# EAGLE board RelayBoard (EAGLE 6.5.0), part 1 of 2
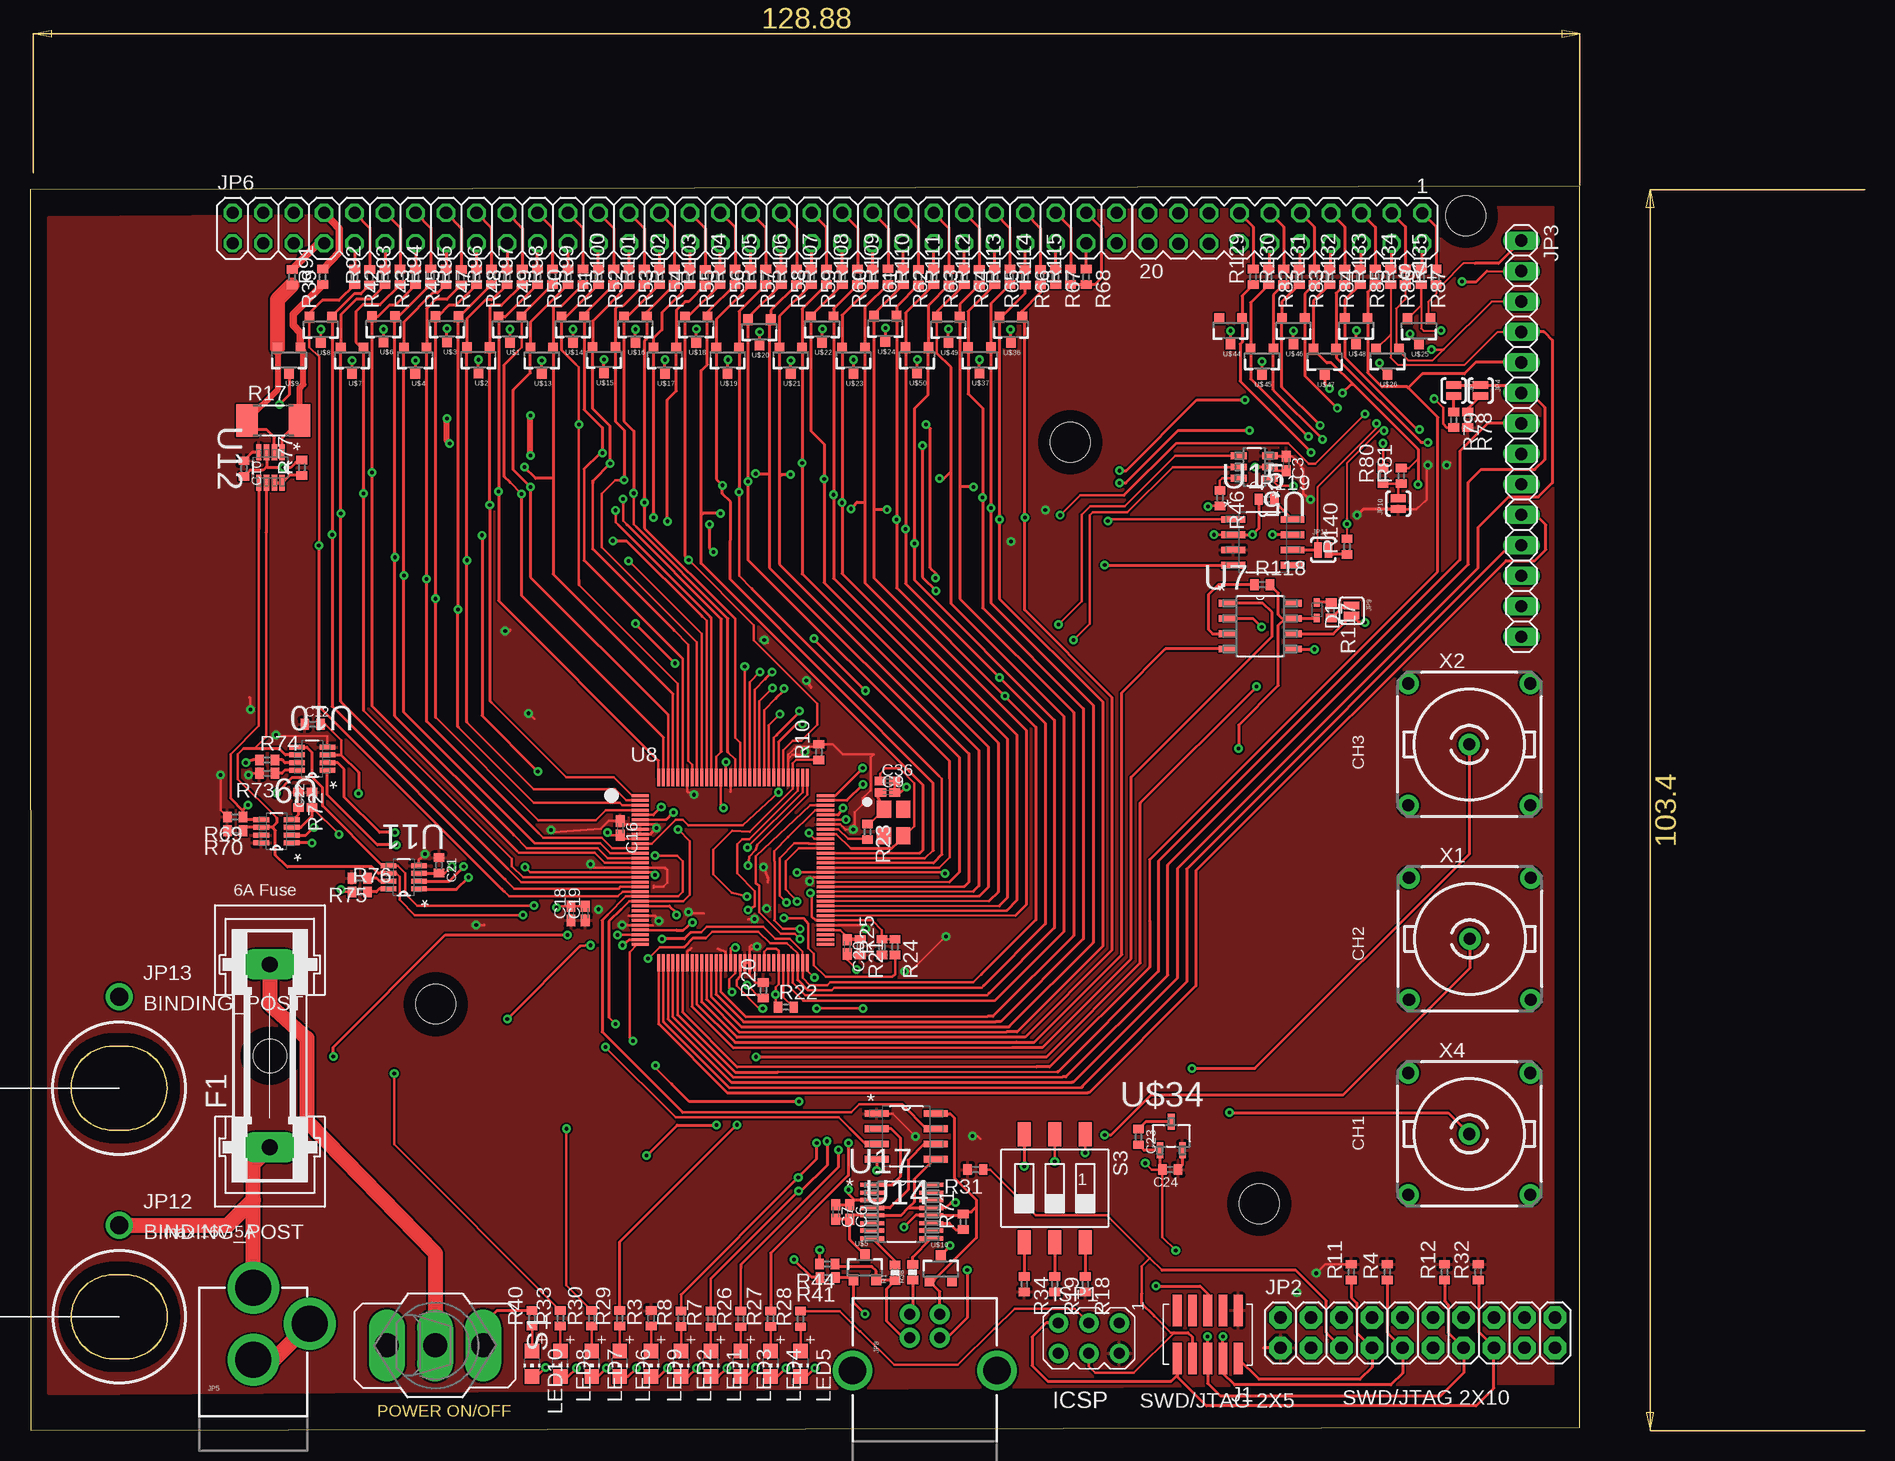
[diagram p0: board, top side]
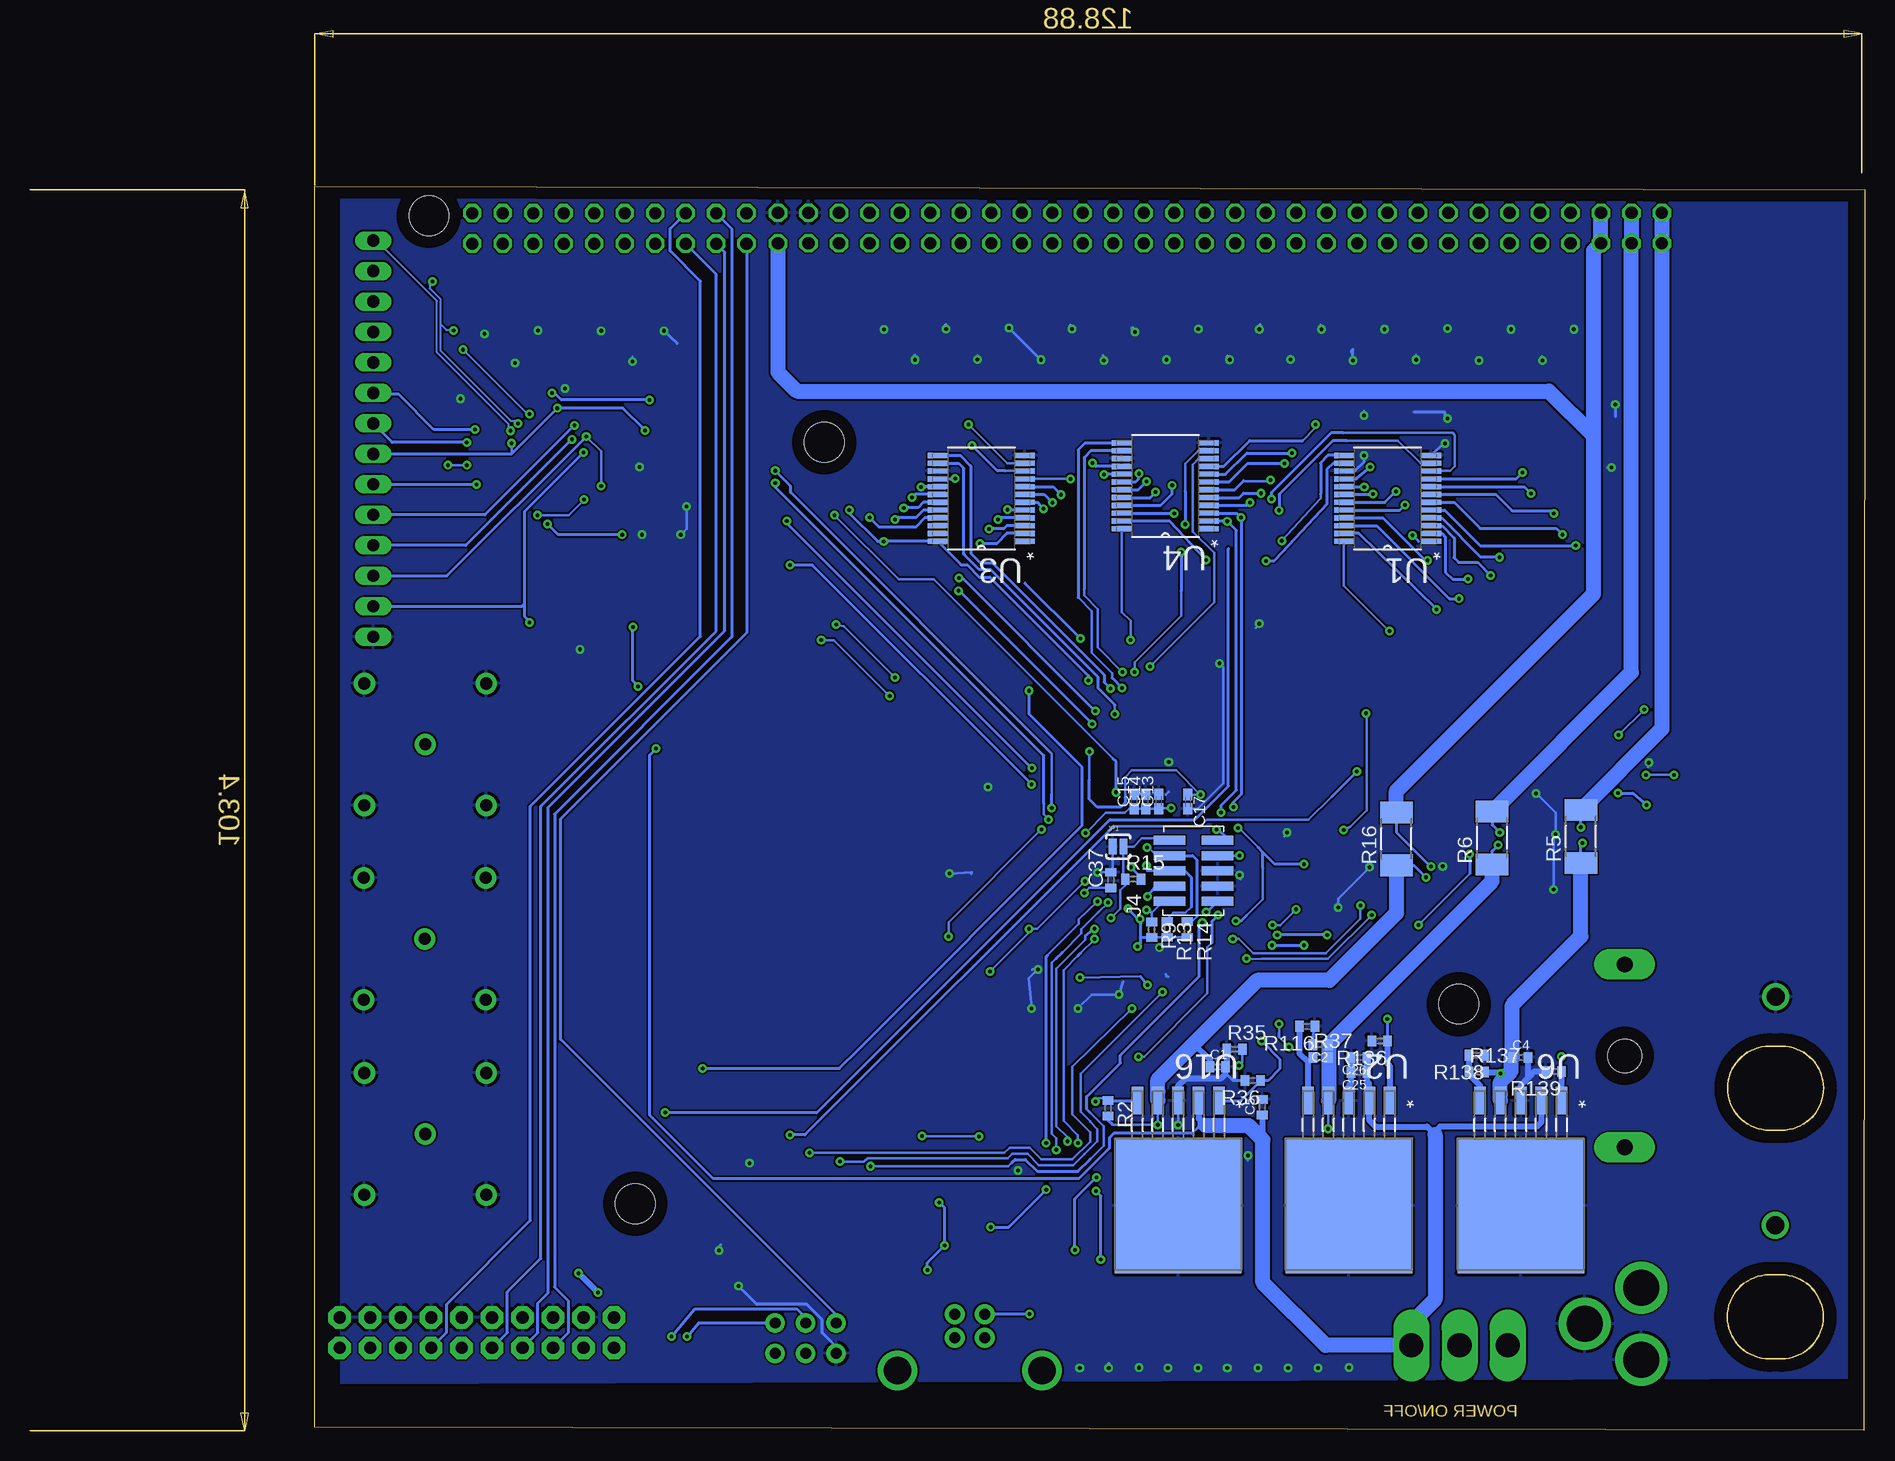
[diagram p1: board, bottom side, seen from below]

Size 129.13 x 103.68 mm. Coordinates in mm from the lower left corner, seen from the top.
Outline: 0.05,0 129.13,0.28 129.13,103.68 0,103.4 0.05,0
Copper layers (1*16): Top 0.035mm / dielectric 1.5mm / Bottom 0.035mm
Design rules "default *": minimum track width 6mil, minimum drill 12mil, track to track 6mil, track to pad 6mil, pad to pad 6mil, via to via 6mil, smd to smd 6mil, copper to edge 40mil, drill to drill 8mil, minimum pad ring 10mil, minimum via ring 8mil, stop-mask expansion 4mil, vias tented up to drill 0mil, thermal gap 10mil
Net classes: 1 PP: width 0.254 mm; 2 Ethernet: width 0.22 mm, clearance 0.152 mm; 3 digital: width 0.152 mm; 4 analog: width 0.152 mm

## Footprints (pad centres in the part's own frame; a part is rotated, then mirrored left to right if it is on the bottom)
C0402 = smd 0.7 x 0.9: 1 -0.65,0; 2 0.65,0
C0402K = smd 0.925 x 0.74: 1 -0.6,0; 2 0.6,0
SOD523 = smd 0.7 x 0.5: A 0.7,0; C -0.6,0
GSH15 = drill 1.321 pad 2.54 long: 1 -7.62,0; 2 7.62,0 | hole 2.794: 0,0
AVRISP = drill 0.9 pad 1.626: 1 -1.27,2.54; 2 1.27,2.54; 3 -1.27,0; 4 1.27,0; 5 -1.27,-2.54; 6 1.27,-2.54
CON_2X5_50MIL = smd 0.74 x 2.6: P1 0,0; P2 0,4.008; P3 1.27,0; P4 1.27,4.008; P5 2.54,0; P6 2.54,4.008; P7 3.81,0; P8 3.81,4.008; P9 5.08,0; P10 5.08,4.008
SJ_2S-NO = smd 0.635 x 1.27: 1 -0.45,0; 2 0.45,0
2X10 = drill 1.016 pad 1.88 octagon: 1 -11.43,-1.27; 2 -11.43,1.27; 3 -8.89,-1.27; 4 -8.89,1.27; 5 -6.35,-1.27; 6 -6.35,1.27; 7 -3.81,-1.27; 8 -3.81,1.27; 9 -1.27,-1.27; 10 -1.27,1.27; 11 1.27,-1.27; 12 1.27,1.27; 13 3.81,-1.27; 14 3.81,1.27; 15 6.35,-1.27; 16 6.35,1.27; 17 8.89,-1.27; 18 8.89,1.27; 19 11.43,-1.27; 20 11.43,1.27
1X14 = drill 1.016 long: 1 -16.51,0; 2 -13.97,0; 3 -11.43,0; 4 -8.89,0; 5 -6.35,0; 6 -3.81,0; 7 -1.27,0; 8 1.27,0; 9 3.81,0; 10 6.35,0; 11 8.89,0; 12 11.43,0; 13 13.97,0; 14 16.51,0
POWER_JACK_PTH = drill 2.997 pad 4.318: GND 0,7.7; GNDBREAK 4.7,10.7; PWR 0,13.7
2X30 = drill 1.016 octagon: 1 -38.1,-1.27; 2 -38.1,1.27; 3 -35.56,-1.27; 4 -35.56,1.27; 5 -33.02,-1.27; 6 -33.02,1.27; 7 -30.48,-1.27; 8 -30.48,1.27; 9 -27.94,-1.27; 10 -27.94,1.27; 11 -25.4,-1.27; 12 -25.4,1.27; 13 -22.86,-1.27; 14 -22.86,1.27; 15 -20.32,-1.27; 16 -20.32,1.27; 17 -17.78,-1.27; 18 -17.78,1.27; 19 -15.24,-1.27; 20 -15.24,1.27; 21 -12.7,-1.27; 22 -12.7,1.27; 23 -10.16,-1.27; 24 -10.16,1.27; 25 -7.62,-1.27; 26 -7.62,1.27; 27 -5.08,-1.27; 28 -5.08,1.27; 29 -2.54,-1.27; 30 -2.54,1.27; 31 0,-1.27; 32 0,1.27; 33 2.54,-1.27; 34 2.54,1.27; 35 5.08,-1.27; 36 5.08,1.27; 37 7.62,-1.27; 38 7.62,1.27; 39 10.16,-1.27; 40 10.16,1.27; 41 12.7,-1.27; 42 12.7,1.27; 43 15.24,-1.27; 44 15.24,1.27; 45 17.78,-1.27; 46 17.78,1.27; 47 20.32,-1.27; 48 20.32,1.27; 49 22.86,-1.27; 50 22.86,1.27; 51 25.4,-1.27; 52 25.4,1.27; 53 27.94,-1.27; 54 27.94,1.27; 55 30.48,-1.27; 56 30.48,1.27; 57 33.02,-1.27; 58 33.02,1.27; 59 35.56,-1.27; 60 35.56,1.27
USB-B-PTH = drill 0.914 pad 1.676: D+ 0,1.25; D- 1.981,1.25; GND 0,-1.25; VBUS 1.981,-1.25 | drill 2.286: S1 -2.718,-6.02; S2 -2.718,6.02
SJ_2S = smd 0.635 x 1.27: 1 -0.412,0; 2 0.412,0
BINDING_POST = drill 1.5: P$1 0,7.62
CHIP-LED0805 = smd 1.2 x 1.2: A 0,-1.05; C 0,1.05
0402-RES = smd 0.7 x 0.9: 1 -0.65,0; 2 0.65,0
R0402 = smd 0.7 x 0.9: 1 -0.65,0; 2 0.65,0
R5025 = smd 1.8 x 2.7: 1 -2.2,0; 2 2.2,0
320-916 = drill 2.007 long: 1 0,4.013; 2 0,0; 3 0,-4.013
SMS-003 = smd 1.092 x 2.007: 1 -2.54,-4.496; 2 0,-4.496; 3 2.54,-4.496; 4 2.54,4.496; 5 0,4.496; 6 -2.54,4.496
STAND-OFF = hole 3.302: 0,0
MA10-2 = drill 1.016 octagon: 1 -11.43,-1.27; 2 -11.43,1.27; 3 -8.89,-1.27; 4 -8.89,1.27; 5 -6.35,-1.27; 6 -6.35,1.27; 7 -3.81,-1.27; 8 -3.81,1.27; 9 -1.27,-1.27; 10 -1.27,1.27; 11 1.27,-1.27; 12 1.27,1.27; 13 3.81,-1.27; 14 3.81,1.27; 15 6.35,-1.27; 16 6.35,1.27; 17 8.89,-1.27; 18 8.89,1.27; 19 11.43,-1.27; 20 11.43,1.27
SOP65P780X200-24N = smd 1.651 x 0.432: 1 -3.632,3.581; 2 -3.632,2.921; 3 -3.632,2.286; 4 -3.632,1.626; 5 -3.632,0.965; 6 -3.632,0.33; 7 -3.632,-0.33; 8 -3.632,-0.965; 9 -3.632,-1.626; 10 -3.632,-2.286; 11 -3.632,-2.921; 12 -3.632,-3.581; 13 3.632,-3.581; 14 3.632,-2.921; 15 3.632,-2.286; 16 3.632,-1.626; 17 3.632,-0.965; 18 3.632,-0.33; 19 3.632,0.33; 20 3.632,0.965; 21 3.632,1.626; 22 3.632,2.286; 23 3.632,2.921; 24 3.632,3.581
TO170P1485X457-6N = smd 0.965 x 2.286: 1 -3.404,-8.611; 2 -1.702,-8.611; 3 0,-8.611; 4 1.702,-8.611; 5 3.404,-8.611 | smd 10.541 x 11.227: 6 0,0.152
SOT95P270X145-6N = smd 1.321 x 0.559: 1 -1.295,0.94; 2 -1.295,0; 3 -1.295,-0.94; 4 1.295,-0.94; 5 1.295,0; 6 1.295,0.94
SOIC127P600X175-8N = smd 1.473 x 0.559: 1 -2.718,1.905; 2 -2.718,0.635; 3 -2.718,-0.635; 4 -2.718,-1.905; 5 2.718,-1.905; 6 2.718,-0.635; 7 2.718,0.635; 8 2.718,1.905
TQFP-128 = smd 1.45 x 0.25: P$1 0,0; P$2 0,-0.4; P$3 0,-0.8; P$4 0,-1.2; P$5 0,-1.6; P$6 0,-2; P$7 0,-2.4; P$8 0,-2.8; P$9 0,-3.2; P$10 0,-3.6; P$11 0,-4; P$12 0,-4.4; P$13 0,-4.8; P$14 0,-5.2; P$15 0,-5.6; P$16 0,-6; P$17 0,-6.4; P$18 0,-6.8; P$19 0,-7.2; P$20 0,-7.6; P$21 0,-8; P$22 0,-8.4; P$23 0,-8.8; P$24 0,-9.2; P$25 0,-9.6; P$26 0,-10; P$27 0,-10.4; P$28 0,-10.8; P$29 0,-11.2; P$30 0,-11.6; P$31 0,-12; P$32 0,-12.4; P$65 15.45,-12.4; P$66 15.45,-12; P$67 15.45,-11.6; P$68 15.45,-11.2; P$69 15.45,-10.8; P$70 15.45,-10.4; P$71 15.45,-10; P$72 15.45,-9.6; P$73 15.45,-9.2; P$74 15.45,-8.8; P$75 15.45,-8.4; P$76 15.45,-8; P$77 15.45,-7.6; P$78 15.45,-7.2; P$79 15.45,-6.8; P$80 15.45,-6.4; P$81 15.45,-6; P$82 15.45,-5.6; P$83 15.45,-5.2; P$84 15.45,-4.8; P$85 15.45,-4.4; P$86 15.45,-4; P$87 15.45,-3.6; P$88 15.45,-3.2; P$89 15.45,-2.8; P$90 15.45,-2.4; P$91 15.45,-2; P$92 15.45,-1.6; P$93 15.45,-1.2; P$94 15.45,-0.8; P$95 15.45,-0.4; P$96 15.45,0 | smd 0.25 x 1.45: P$33 1.525,-13.925; P$34 1.925,-13.925; P$35 2.325,-13.925; P$36 2.725,-13.925; P$37 3.125,-13.925; P$38 3.525,-13.925; P$39 3.925,-13.925; P$40 4.325,-13.925; P$41 4.725,-13.925; P$42 5.125,-13.925; P$43 5.525,-13.925; P$44 5.925,-13.925; P$45 6.325,-13.925; P$46 6.725,-13.925; P$47 7.125,-13.925; P$48 7.525,-13.925; P$49 7.925,-13.925; P$50 8.325,-13.925; P$51 8.725,-13.925; P$52 9.125,-13.925; P$53 9.525,-13.925; P$54 9.925,-13.925; P$55 10.325,-13.925; P$56 10.725,-13.925; P$57 11.125,-13.925; P$58 11.525,-13.925; P$59 11.925,-13.925; P$60 12.325,-13.925; P$61 12.725,-13.925; P$62 13.125,-13.925; P$63 13.525,-13.925; P$64 13.925,-13.925; P$97 13.925,1.525; P$98 13.525,1.525; P$99 13.125,1.525; P$100 12.725,1.525; P$101 12.325,1.525; P$102 11.925,1.525; P$103 11.525,1.525; P$104 11.125,1.525; P$105 10.725,1.525; P$106 10.325,1.525; P$107 9.925,1.525; P$108 9.525,1.525; P$109 9.125,1.525; P$110 8.725,1.525; P$111 8.325,1.525; P$112 7.925,1.525; P$113 7.525,1.525; P$114 7.125,1.525; P$115 6.725,1.525; P$116 6.325,1.525; P$117 5.925,1.525; P$118 5.525,1.525; P$119 5.125,1.525; P$120 4.725,1.525; P$121 4.325,1.525; P$122 3.925,1.525; P$123 3.525,1.525; P$124 3.125,1.525; P$125 2.725,1.525; P$126 2.325,1.525; P$127 1.925,1.525; P$128 1.525,1.525
SOT65P280X145-8N = smd 1.321 x 0.432: 1 -1.27,0.965; 2 -1.27,0.33; 3 -1.27,-0.33; 4 -1.27,-0.965; 5 1.27,-0.965; 6 1.27,-0.33; 7 1.27,0.33; 8 1.27,0.965
SOIC127P600X175-8N' = smd 1.981 x 0.559: 1 -2.464,1.905; 2 -2.464,0.635; 3 -2.464,-0.635; 4 -2.464,-1.905; 5 2.464,-1.905; 6 2.464,-0.635; 7 2.464,0.635; 8 2.464,1.905
SOP63P600X175-16N = smd 1.981 x 0.356: 1 -2.464,2.235; 2 -2.464,1.575; 3 -2.464,0.965; 4 -2.464,0.305; 5 -2.464,-0.305; 6 -2.464,-0.965; 7 -2.464,-1.575; 8 -2.464,-2.235; 9 2.464,-2.235; 10 2.464,-1.575; 11 2.464,-0.965; 12 2.464,-0.305; 13 2.464,0.305; 14 2.464,0.965; 15 2.464,1.575; 16 2.464,2.235
SOT23-3 = smd 0.8 x 0.9: 1 -0.95,-1; 2 0.95,-1; 3 0,1.1
SOT95P300X145-3N = smd 0.559 x 1.321: 1 -0.94,-1.194; 2 0.94,-1.194; 3 0,1.194
A1944 = drill 1.016 pad 1.778: 1 0,0; 2 5.08,5.08; 3 -5.08,5.08; 4 -5.08,-5.08; 5 5.08,-5.08
NDK3.2X2.5 = smd 1.4 x 1.2: P$1 0,0; P$2 2.2,0; P$3 2.2,1.6; P$4 0,1.6

## Placement (x,y rotation side)
C1  10uF  [C0402]  53.9,30.3 0 bottom
C2  10uF  [C0402]  45.31,32.16 180 bottom
C3  0.1uF  [C0402K]  104.7,80.59 270 top
C4  10uF  [C0402]  28.7,31.09 0 bottom
C5  10uF  [C0402]  50.19,26.95 90 bottom
C6  0.1uF  [C0402K]  68.33,18.21 270 top
C7  10uF  [C0402K]  67.16,18.21 270 top
C9  12pF  [C0402K]  71.48,53.16 0 top
C10  0.1uF  [C0402]  17.83,80.16 270 top
C12  0.1uF  [C0402]  23.55,58.85 0 top
C13  0.1uF  [C0402K]  58.83,52.43 90 bottom
C14  0.1uF  [C0402K]  59.92,52.43 90 bottom
C15  2.2uF  [C0402K]  60.86,52.43 90 bottom
C16  0.1uF  [C0402K]  49.2,50.19 270 top
C17  0.1uF  [C0402K]  56.39,52.4 270 bottom
C18  0.1uF  [C0402K]  45.09,43.1 90 top
C19  0.1uF  [C0402K]  46.28,43.1 90 top
C20  0.1uF  [C0402K]  68.1,40.31 270 top
C21  0.1uF  [C0402]  34.09,47.09 270 top
C22  0.1uF  [C0402]  23.5,52.55 90 top
C23  1uF  [C0402]  92.38,24.46 270 top
C24  1uF  [C0402]  95.02,21.74 180 top
C25  10uF  [C0402]  42.14,29.84 180 bottom
C26  10uF  [C0402]  42.14,31.09 180 bottom
C36  12pF  [C0402K]  71.45,54.13 0 top
C37  0.1uF  [C0402]  62.81,45.87 90 bottom
D1  [SOD523]  107.24,68.4 270 top
F1  [GSH15]  19.99,31.22 90 top
ISP1  AVRISP-6  [AVRISP]  88.24,7.7 270 top
J1  JTAG_ARM_10PIN  [CON_2X5_50MIL]  100.69,10.01 180 top
J4  JTAG_ARM_10PIN  [CON_2X5_50MIL]  53.92,44.09 90 bottom
JP1  RESET  [SJ_2S-NO]  62.2,48.67 0 bottom
JP2  [2X10]  115.65,8.15 0 top
JP3  [1X14]  124.28,82.65 270 top
JP4  DUT_CS_MASTER  [SJ_2S-NO]  120.88,86.66 270 top
JP5  POWER_JACKPTH  [POWER_JACK_PTH]  18.62,-1.8 0 top
JP6  [2X30]  54.99,100.2 0 top
JP7  DUT_CS_RecieveAllMSG  [SJ_2S-NO]  118.64,86.66 270 top
JP8  USB-B  [USB-B-PTH]  74.57,7.72 90 top
JP9  [SJ_2S]  110.13,68.33 270 top
JP10  DUT_CS_MASTER  [SJ_2S-NO]  114.02,77.24 90 top
JP11  [SJ_2S-NO]  107.77,73.38 0 top
JP12  BINDING_POST  [BINDING_POST]  7.44,9.47 0 top
JP13  BINDING_POST  [BINDING_POST]  7.42,28.52 0 top
LED1  [CHIP-LED0805]  56.74,5.56 180 top
LED2  [CHIP-LED0805]  54.25,5.56 180 top
LED3  [CHIP-LED0805]  59.23,5.56 180 top
LED4  [CHIP-LED0805]  61.72,5.56 180 top
LED5  [CHIP-LED0805]  64.21,5.56 180 top
LED6  [CHIP-LED0805]  49.15,5.56 180 top
LED7  [CHIP-LED0805]  46.81,5.56 180 top
LED8  [CHIP-LED0805]  44.2,5.56 180 top
LED9  [CHIP-LED0805]  51.77,5.56 180 top
LED10  [CHIP-LED0805]  41.83,5.56 180 top
R1  22R  [0402-RES]  72.09,13.16 90 top
R2  [R0402]  63.04,26.85 270 bottom
R3  [R0402]  51.77,9.35 90 top
R4  4k7  [R0402]  113.11,13.21 90 top
R5  [R5025]  23.65,49.5 90 bottom
R6  [R5025]  31.04,49.38 90 bottom
R7  [R0402]  56.74,9.3 90 top
R8  [R0402]  54.25,9.32 90 top
R9  4.7k  [R0402]  59.41,41.73 270 bottom
R10  4.7k  [R0402]  65.74,56.54 90 top
R11  4k7  [R0402]  110.11,13.21 90 top
R12  4k7  [R0402]  117.88,13.21 90 top
R13  4.7k  [R0402]  58.12,41.76 270 bottom
R14  4.7k  [R0402]  56.44,41.76 270 bottom
R15  4.7k  [R0402]  60.96,45.95 0 bottom
R16  [R5025]  39.01,49.3 90 bottom
R17  [R5025]  20.27,84.18 0 top
R18  4.7k  [R0402]  87.94,12.19 270 top
R19  4.7k  [R0402]  85.39,12.19 270 top
R20  1M  [R0402]  61.11,36.68 90 top
R21  51  [R0402]  69.19,40.28 270 top
R22  4.87k 1%  [R0402]  62.99,35.28 0 top
R23  2k  [R0402]  69.8,49.89 270 top
R24  100  [R0402]  72.09,40.28 270 top
R25  10k  [R0402]  70.99,40.28 90 top
R26  [R0402]  59.23,9.3 90 top
R27  [R0402]  61.72,9.32 90 top
R28  [R0402]  64.21,9.3 90 top
R29  [R0402]  49.15,9.35 90 top
R30  [R0402]  46.81,9.35 90 top
R31  4k7  [R0402]  78.79,21.74 180 top
R32  4k7  [R0402]  120.68,13.21 90 top
R33  [R0402]  44.2,9.35 90 top
R34  4.7k  [R0402]  82.86,12.19 270 top
R35  [R0402]  52.5,31.77 0 bottom
R36  4k7  [R0402]  50.98,29.16 180 bottom
R37  [R0402]  45.31,31.09 0 bottom
R38  22R  [0402-RES]  73.56,13.18 90 top
R39  200R  [R0402]  21.84,96.11 270 top
R40  [R0402]  41.83,9.35 90 top
R41  0R  [R0402]  66.47,12.75 180 top
R42  200R  [R0402]  27.05,96.14 270 top
R43  200R  [R0402]  29.59,96.14 270 top
R44  0R  [R0402]  66.45,13.87 180 top
R45  200R  [R0402]  32.13,96.14 270 top
R46  4.7k  [R0402]  99.16,77.7 270 top
R47  200R  [R0402]  34.67,96.14 270 top
R48  200R  [R0402]  37.21,96.14 270 top
R49  200R  [R0402]  39.75,96.14 270 top
R50  200R  [R0402]  42.29,96.14 270 top
R51  200R  [R0402]  44.83,96.14 270 top
R52  200R  [R0402]  47.37,96.14 270 top
R53  200R  [R0402]  49.91,96.14 270 top
R54  200R  [R0402]  52.45,96.14 270 top
R55  200R  [R0402]  54.99,96.14 270 top
R56  200R  [R0402]  57.51,96.14 270 top
R57  200R  [R0402]  60.07,96.14 270 top
R58  200R  [R0402]  62.61,96.14 270 top
R59  200R  [R0402]  65.1,96.14 270 top
R60  200R  [R0402]  67.69,96.14 270 top
R61  200R  [R0402]  70.23,96.14 270 top
R62  200R  [R0402]  72.77,96.14 270 top
R63  200R  [R0402]  75.31,96.14 270 top
R64  200R  [R0402]  77.85,96.14 270 top
R65  200R  [R0402]  80.39,96.14 270 top
R66  200R  [R0402]  82.93,96.11 270 top
R67  200R  [R0402]  85.47,96.14 270 top
R68  200R  [R0402]  88.01,96.14 270 top
R69  4.7k  [R0402]  17.09,51.13 180 top
R70  4.7k  [R0402]  17.09,49.99 180 top
R71  4.7k  [R0402]  77.78,17.4 90 top
R72  4k7  [R0402]  22.38,52.55 270 top
R73  4k7  [R0402]  19.76,54.76 180 top
R74  4k7  [R0402]  19.76,55.88 0 top
R75  4k7  [R0402]  27.48,46.02 180 top
R76  4k7  [R0402]  27.48,44.88 0 top
R77  4k7  [R0402]  22.66,80.24 90 top
R78  4.7k  [R0402]  119.81,84.23 270 top
R79  4.7k  [R0402]  118.64,84.23 270 top
R80  4.7k  [R0402]  112.75,79.55 90 top
R81  4.7k  [R0402]  114.27,79.55 90 top
R82  200R  [R0402]  103.23,96.14 270 top
R83  200R  [R0402]  105.77,96.14 270 top
R84  200R  [R0402]  108.31,96.14 270 top
R85  200R  [R0402]  110.85,96.14 270 top
R86  200R  [R0402]  113.39,96.14 270 top
R87  200R  [R0402]  115.93,96.14 270 top
R91  200R  [R0402]  24.38,96.14 90 top
R92  200R  [R0402]  28.32,96.11 90 top
R93  200R  [R0402]  30.84,96.14 90 top
R94  200R  [R0402]  33.4,96.16 90 top
R95  200R  [R0402]  35.94,96.11 90 top
R96  200R  [R0402]  38.46,96.14 90 top
R97  200R  [R0402]  41.02,96.14 90 top
R98  200R  [R0402]  43.54,96.14 90 top
R99  200R  [R0402]  46.08,96.14 90 top
R100  200R  [R0402]  48.64,96.14 90 top
R101  200R  [R0402]  51.18,96.14 90 top
R102  200R  [R0402]  53.7,96.14 90 top
R103  200R  [R0402]  56.26,96.11 90 top
R104  200R  [R0402]  58.75,96.14 90 top
R105  200R  [R0402]  61.32,96.14 90 top
R106  200R  [R0402]  63.88,96.14 90 top
R107  200R  [R0402]  66.37,96.14 90 top
R108  200R  [R0402]  68.96,96.14 90 top
R109  200R  [R0402]  71.5,96.16 90 top
R110  200R  [R0402]  74.04,96.11 90 top
R111  200R  [R0402]  76.58,96.11 90 top
R112  200R  [R0402]  79.1,96.11 90 top
R113  200R  [R0402]  81.66,96.14 90 top
R114  200R  [R0402]  84.2,96.11 90 top
R115  200R  [R0402]  86.72,96.14 90 top
R116  [R0402]  46.46,33.68 180 bottom
R117  1k  [R0402]  108.43,68.35 270 top
R118  4k7  [R0402]  102.69,70.48 0 top
R119  4k7  [R0402]  103.05,77.6 0 top
R129  200R  [R0402]  101.93,96.14 90 top
R130  200R  [R0402]  104.47,96.14 90 top
R131  200R  [R0402]  107.01,96.14 90 top
R132  200R  [R0402]  109.55,96.14 90 top
R133  200R  [R0402]  112.12,96.16 90 top
R134  200R  [R0402]  114.61,96.14 90 top
R135  200R  [R0402]  117.17,96.14 90 top
R136  4k7  [R0402]  40.41,32.46 180 bottom
R137  [R0402]  32.31,29.87 0 bottom
R138  [R0402]  32.31,31.27 180 bottom
R139  4k7  [R0402]  25.91,29.92 180 bottom
R140  120  [R0402]  109.75,73.66 90 top
S1  [320-916]  33.76,7.09 270 top
S3  SWS003  [SMS-003]  85.39,20.19 180 top
STANDOFF1  STAND-OFF  [STAND-OFF]  33.81,35.53 0 top
STANDOFF2  STAND-OFF  [STAND-OFF]  119.63,101.22 0 top
STANDOFF5  STAND-OFF  [STAND-OFF]  86.69,82.35 0 top
STANDOFF6  STAND-OFF  [STAND-OFF]  102.44,18.9 0 top
SV1  [MA10-2]  104.6,100.18 180 top
U1  CD74HC4067SM96  [SOP65P780X200-24N]  39.75,77.67 180 bottom
U2  TL1963AKTTR.  [TO170P1485X457-6N]  42.98,18.87 180 bottom
U3  CD74HC4067SM96  [SOP65P780X200-24N]  73.61,77.67 180 bottom
U4  CD74HC4067SM96  [SOP65P780X200-24N]  58.27,78.71 180 bottom
U5  MCP4725A0T-E/CH  [SOT95P270X145-6N]  102.03,80.29 180 top
U6  TL1963AKTTR.  [TO170P1485X457-6N]  28.65,18.87 180 bottom
U7  MCP2003-E/SN  [SOIC127P600X175-8N]  102.51,67.03 0 top
U8  TM4C1294NCPDT  [TQFP-128]  50.85,52.91 0 top
U9  INA219AIDCNR  [SOT65P280X145-8N]  20.55,49.94 180 top
U10  INA219AIDCNR  [SOT65P280X145-8N]  23.52,55.98 180 top
U11  INA219AIDCNR  [SOT65P280X145-8N]  31.14,46.1 180 top
U12  INA219AIDCNR  [SOT65P280X145-8N]  20.04,80.24 270 top
U14  ADUM1201ARZ  [SOIC127P600X175-8N']  73.03,24.51 0 top
U15  SN65HVD230D  [SOIC127P600X175-8N']  102.74,74.02 0 top
U16  TL1963AKTTR.  [TO170P1485X457-6N]  57.2,18.87 180 bottom
U17  FT230XS  [SOP63P600X175-16N]  72.64,18.24 0 top
U$1  zener_3.3V  [SOT23-3]  40.01,91.8 180 top
U$2  zener_3.3V  [SOT23-3]  37.36,89.23 180 top
U$3  zener_3.3V  [SOT23-3]  34.75,91.82 180 top
U$4  zener_3.3V  [SOT23-3]  32.11,89.2 180 top
U$5  zener_3.3V  [SOT23-3]  69.57,13.56 0 top
U$6  zener_3.3V  [SOT23-3]  29.46,91.82 180 top
U$7  zener_3.3V  [SOT23-3]  26.85,89.2 180 top
U$8  zener_3.3V  [SOT23-3]  24.23,91.77 180 top
U$9  zener_3.3V  [SOT23-3]  21.59,89.2 180 top
U$10  zener_3.3V  [SOT23-3]  75.9,13.46 0 top
U$13  zener_3.3V  [SOT23-3]  42.65,89.2 180 top
U$14  zener_3.3V  [SOT23-3]  45.24,91.8 180 top
U$15  zener_3.3V  [SOT23-3]  47.83,89.26 180 top
U$16  zener_3.3V  [SOT23-3]  50.44,91.8 180 top
U$17  zener_3.3V  [SOT23-3]  52.91,89.2 180 top
U$18  zener_3.3V  [SOT23-3]  55.52,91.8 180 top
U$19  zener_3.3V  [SOT23-3]  58.14,89.2 180 top
U$20  zener_3.3V  [SOT23-3]  60.78,91.57 180 top
U$21  zener_3.3V  [SOT23-3]  63.4,89.2 180 top
U$22  zener_3.3V  [SOT23-3]  66.01,91.8 180 top
U$23  zener_3.3V  [SOT23-3]  68.63,89.2 180 top
U$24  zener_3.3V  [SOT23-3]  71.27,91.85 180 top
U$25  zener_3.3V  [SOT23-3]  115.75,91.64 180 top
U$26  zener_3.3V  [SOT23-3]  113.13,89.13 180 top
U$34  MCP1703T-3302E/CB  [SOT95P300X145-3N]  95.1,24.54 0 top
U$36  zener_3.3V  [SOT23-3]  81.74,91.77 180 top
U$37  zener_3.3V  [SOT23-3]  79.12,89.23 180 top
U$44  zener_3.3V  [SOT23-3]  100.05,91.67 180 top
U$45  zener_3.3V  [SOT23-3]  102.67,89.13 180 top
U$46  zener_3.3V  [SOT23-3]  105.28,91.67 180 top
U$47  zener_3.3V  [SOT23-3]  107.9,89.1 180 top
U$48  zener_3.3V  [SOT23-3]  110.52,91.67 180 top
U$49  zener_3.3V  [SOT23-3]  76.53,91.77 180 top
U$50  zener_3.3V  [SOT23-3]  73.91,89.23 180 top
X1  A1944-50  [A1944]  119.99,40.97 0 top
X2  A1944-50  [A1944]  119.94,57.18 0 top
X4  A1944-50  [A1944]  119.94,24.71 0 top
Y3  NX3225GA  [NDK3.2X2.5]  71.17,51.76 270 top

## Library data of the parts
C1-C7 C9 C10 C12-C26 C36 R20-R25 = rcl
C37 = eagle-ltspice; SPICEMODEL: NONE; SPICEPREFIX: C
D1 = diode
F1 = fuse; MPN: 64900001039; OC_FARNELL: 1271673; OC_NEWARK: 02P0318
ISP1 JP3 LED1-LED10 R5 R6 R16 R17 = JDT-1800_smahed
J1 J4 = MRDT-Connectors; PARTNO: M50-3600542
JP1 JP4 JP7 JP9 JP10 = SparkFun-Retired
JP2 JP12 JP13 = SparkFun-Connectors
JP5 = SparkFun-Connectors; PROD_ID: CONN-08197
JP6 = pinhead
JP8 = SparkFun-Connectors; PROD_ID: CONN-08278
JP11 = SparkFun
R1 R38 = SparkFun-Passives
R2-R4 R7-R15 R18 R19 R26-R37 R39-R87 R91-R119 R129-R140 = resistor
S1 = switch
S3 = smd-special
STANDOFF1 STANDOFF2 STANDOFF5 STANDOFF6 = SparkFun-Electromechanical
SV1 = con-lstb; OC_FARNELL: unknown; OC_NEWARK: unknown
U1 U3 U4 = MUX; MPN: CD74HC4067SM96; OC_FARNELL: 1601157; OC_NEWARK: 13N4201; PACKAGE: SOP-24; SUPPLIER: TEXAS INSTRUMENTS
U2 U6 U16 = TL1963; MPN: TL1963AKTTR.; OC_FARNELL: 2112627; OC_NEWARK: 33R2190; PACKAGE: 5TO263; SUPPLIER: TEXAS INSTRUMENTS
U5 = MCP4725; MPN: MCP4725A0T-E/CH; OC_FARNELL: 1578449; OC_NEWARK: 77M3032; PACKAGE: SOT-23-6; SUPPLIER: Microchip
U7 = MCP2003-E_SN; MPN: MCP2003-E/SN; OC_FARNELL: 1826237; OC_NEWARK: 65R5493; PACKAGE: SOIC-8; SUPPLIER: Microchip
U8 = MRDT-Microcontrollers
U9-U12 = INA219; MPN: INA219AIDCNR; OC_FARNELL: 2295989; OC_NEWARK: 09P2546; PACKAGE: SOT-23-8; SUPPLIER: Texas Instruments
U14 = ADUM1201ARZ; MPN: ADUM1201ARZ; OC_FARNELL: 1078200; OC_NEWARK: 19M0753; PACKAGE: SOIC-8; SUPPLIER: Analog Devices
U15 = sn65hvd23x; MPN: SN65HVD230D; OC_FARNELL: 1103105; OC_NEWARK: 75C7744; PACKAGE: SOIC-8; SUPPLIER: Texas Instruments
U17 = FT230XS; MPN: FT230XS; OC_FARNELL: 2081321; OC_NEWARK: 83T7087; PACKAGE: SSOP-16; SUPPLIER: FTDI
U$1-U$10 U$13-U$26 U$36 U$37 U$44-U$50 = SparkFun-DiscreteSemi
U$34 = MCP1703; MPN: MCP1703T-3302E/CB; OC_FARNELL: 1439518; OC_NEWARK: 40M0637; PACKAGE: SOT-3; SUPPLIER: Microchip
X1 X2 X4 = con-coax; OC_FARNELL: unknown; OC_NEWARK: unknown
Y3 = MRDT-Passives

## Nets
!RESET: J4.P10 JP1.2 R15.1 R24.2
AD0: R42.2 U1.5 U8.P$21 U$8.2
AD1: R92.1 U1.6 U8.P$20 U$8.1
AD2: R43.2 U1.7 U8.P$19 U$7.2
AD3: R93.1 U1.8 U8.P$18 U$7.1
AD4: R45.2 U1.9 U8.P$15 U$6.2
AD5: R94.1 U1.4 U8.P$14 U$6.1
AD6: R47.2 U1.3 U8.P$13 U$4.2
AD7: R95.1 U1.2 U8.P$12 U$4.1
AD8: R48.2 U1.22 U8.P$4 U$3.2
AD9: R96.1 U1.23 U8.P$3 U$3.1
AD10: R49.2 U1.21 U8.P$2 U$2.2
AD11: R97.1 U1.20 U8.P$1 U$2.1
AD12: R50.2 U1.19 U8.P$128 U$1.2
AD13: R98.1 U1.18 U8.P$127 U$1.1
AD14: R51.2 U1.17 U8.P$126 U$13.2
AD15: R99.1 U1.16 U8.P$125 U$13.1
AD16: R52.2 U4.9 U8.P$124 U$14.2
AD17: R100.1 U4.8 U8.P$123 U$14.1
AD18: R53.2 U4.7 U8.P$121 U$15.2
AD19: R101.1 U4.6 U8.P$120 U$15.1
ADJ3: R2.1 R35.2 U16.5
ADJ4: R37.1 R116.2 U2.5
ADJ5: R137.1 R138.2 U6.5
CAN_RX: U8.P$95 U15.4
CAN_TX: U8.P$96 U15.1
CH1: U4.1
CH2: U1.1
CH3: U3.1
D0: R54.2 U4.5 U8.P$112 U$16.2
D1: R102.1 U4.4 U8.P$111 U$16.1
D2: R55.2 U4.3 U8.P$5 U$17.2
D3: R103.1 U4.2 U8.P$6 U$17.1
D4: R56.2 U4.23 U8.P$102 U$18.2
D5: R104.1 U4.22 U8.P$84 U$18.1
D6: R57.2 U4.21 U8.P$83 U$19.2
D7: R105.1 U4.20 U8.P$82 U$19.1
D8: R58.2 U4.19 U8.P$81 U$20.2
D9: R106.1 U4.18 U8.P$78 U$20.1
D10: R59.2 U4.17 U8.P$77 U$21.2
D11: R107.1 U4.16 U8.P$76 U$21.1
D12 [Power]: R60.2 U3.9 U8.P$75 U$22.2
D13 [Power]: R108.1 U3.8 U8.P$74 U$22.1
D14 [Power]: R61.2 U3.7 U8.P$73 U$23.2
D15 [Power]: R109.1 U3.6 U8.P$72 U$23.1
D16 [Power]: R62.2 U3.5 U8.P$71 U$24.2
D19: R111.1 U3.2 U8.P$61 U$50.1
D20: R64.2 U3.16 U8.P$60 U$49.2
D21: R112.1 U3.17 U8.P$46 U$49.1
D22: R65.2 U3.18 U8.P$45 U$37.2
D23: R113.1 U3.19 U8.P$44 U$37.1
D24: R66.2 U3.20 U8.P$43 U$36.2
D25: R114.1 U3.21 U8.P$42 U$36.1
D26: U3.22
D27: U3.23
DUT_AOUT1: JP3.12 R82.2 U5.1 U$45.2
DUT_CAN_N: JP3.2 JP11.1 R87.2 U15.6 U$25.2
DUT_CAN_P: JP3.1 R135.1 R140.2 U15.7 U$25.1
DUT_CONNECT: R27.2 U8.P$85
DUT_CS: JP3.6 JP4.1 JP7.1 R85.2 U8.P$36 U$48.2
DUT_LIN: JP3.13 JP9.2 R129.1 U7.6 U$44.1
DUT_MISO: JP3.4 R86.2 U8.P$35 U$26.2
DUT_MOSI: JP3.7 R132.1 U8.P$37 U$47.1
DUT_ONEWIRE: JP3.3 R134.1 U8.P$11 U$26.1
DUT_RX: JP3.10 R83.2 U8.P$33 U$46.2
DUT_SCL: JP3.8 R80.2 R131.1 U8.P$91 U$46.1
DUT_SCLK: JP3.5 R133.1 U8.P$38 U$48.1
DUT_SDA: JP3.9 R81.2 R84.2 U8.P$92 U$47.2
DUT_SH+ [Power]: R17.2 R91.1 U12.1 U$9.1
DUT_SH- [Power]: R17.1 R39.2 U12.2 U$9.2
DUT_TX: JP3.11 R130.1 U8.P$34 U$45.1
GND: C1.2 C2.2 C3.2 C4.2 C5.2 C9.2 C10.2 C12.2 C13.2 C14.2 C15.2 C16.2 C17.2 C18.2 C19.2 C20.2 C21.2 C22.1 C23.2 C24.2 C25.2 C26.2 C36.2 C37.2 ISP1.6 J1.P5 J4.P3 J4.P5 JP1.1 JP2.4 JP2.6 JP2.8 JP2.10 JP2.12 JP2.14 JP2.16 JP2.18 JP2.20 JP3.14 JP5.GND JP5.GNDBREAK JP6.58 JP6.60 JP13.P$1 LED1.C LED2.C LED3.C LED4.C LED5.C LED6.C LED7.C LED8.C LED9.C LED10.C R22.1 R35.1 R36.2 R46.2 R68.2 R74.1 R76.1 R77.2 R79.2 R115.1 R116.1 R119.1 R136.2 R138.1 R139.2 U1.12 U1.15 U2.3 U2.6 U3.12 U3.15 U4.12 U4.15 U5.2 U6.3 U6.6 U7.5 U8.P$10 U8.P$17 U8.P$48 U8.P$55 U8.P$58 U8.P$80 U8.P$114 U9.3 U10.3 U11.3 U12.3 U14.4 U15.2 U16.3 U16.6 U$1.3 U$2.3 U$3.3 U$4.3 U$6.3 U$7.3 U$8.3 U$9.3 U$13.3 U$14.3 U$15.3 U$16.3 U$17.3 U$18.3 U$19.3 U$20.3 U$21.3 U$22.3 U$23.3 U$24.3 U$25.3 U$26.3 U$34.1 U$36.3 U$37.3 U$44.3 U$45.3 U$46.3 U$47.3 U$48.3 U$49.3 U$50.3 X1.2 X1.3 X1.4 X1.5 X2.2 X2.3 X2.4 X2.5 X4.2 X4.3 X4.4 X4.5
HOST_GND: C6.2 C7.2 JP8.GND U14.5 U17.5 U17.13 U$5.3 U$10.3
HOST_UART_RX: U14.6 U17.4
HOST_UART_TX: U14.2 U17.1
LDO1 [Power]: JP6.5 JP6.6 JP6.59 R16.2 U11.2
LDO1_ENABLE: R36.1 U8.P$32 U16.1
LDO1_SH+ [Power]: C1.1 R2.2 R16.1 R29.2 U11.1 U16.4
LDO2 [Power]: JP6.3 JP6.4 R6.2 U10.2
LDO2_ENABLE: R136.1 U2.1 U8.P$31
LDO2_SH+ [Power]: C2.1 R6.1 R30.2 R37.2 U2.4 U10.1
LDO3 [Power]: JP6.1 JP6.2 R5.2 U9.2
LDO3_ENABLE: R139.1 U6.1 U8.P$30
LDO3_SH+ [Power]: C4.1 R5.1 R33.2 R137.2 U6.4 U9.1
LIN_CS: U7.2 U8.P$24
LIN_RX: U7.1 U8.P$40
LIN_TX: U7.4 U8.P$41
M0OUT: X4.1
M0S0: U4.13 U8.P$107
M0S1: U4.14 U8.P$108
M0S2: U4.11 U8.P$109
M0S3: U4.10 U8.P$110
M1OUT: X1.1
M1S0: U1.10 U8.P$116
M1S1: U1.11 U8.P$117
M1S2: U1.14 U8.P$119
M1S3: U1.13 U8.P$118
M2OUT: X2.1
M2S0: U3.10 U8.P$103
M2S1: U3.11 U8.P$104
M2S2: U3.14 U8.P$105
M2S3: U3.13 U8.P$106
N$1: R46.1 U5.6
N$2: JP11.2 R140.1
N$3: LED2.A R8.1
N$4: R87.1 SV1.2
N$5: LED1.A R7.1
N$6: R135.2 SV1.1
N$7: F1.2 S1.2
N$8: JP6.7 R39.1
N$9: JP6.9 R42.1
N$10: JP6.11 R43.1
N$11: JP6.13 R45.1
N$12: JP6.15 R47.1
N$13: JP6.17 R48.1
N$14: JP6.19 R49.1
N$15: JP6.21 R50.1
N$16: JP6.23 R51.1
N$17: JP6.25 R52.1
N$18: JP6.27 R53.1
N$19: JP6.29 R54.1
N$20: JP6.31 R55.1
N$21: JP6.33 R56.1
N$22: JP6.35 R57.1
N$23: LED3.A R26.1
N$24: JP6.37 R58.1
N$25: LED4.A R27.1
N$26: JP6.39 R59.1
N$27: JP6.41 R60.1
N$28: JP6.43 R61.1
N$29: JP6.45 R62.1
N$30: JP6.47 R63.1
N$31: JP6.49 R64.1
N$32: JP6.51 R65.1
N$33: LED5.A R28.1
N$34: LED6.A R29.1
N$35: LED7.A R30.1
N$36: LED8.A R33.1
N$37: JP6.53 R66.1
N$38: JP6.55 R67.1
N$39: JP6.57 R68.1
N$40: F1.1 JP5.PWR JP12.P$1
N$41: R18.1 S3.6
N$42: R19.1 S3.5
N$43: R34.1 S3.4
N$44: R71.1 U17.11
N$45 [Power]: R73.1 U10.8
N$46 [Power]: R75.1 U11.7
N$47: D1.C R117.1
N$48: R74.2 U10.7
N$49: JP7.2 R79.1
N$50: R76.2 U11.8
N$51: R77.1 U12.7 U12.8
N$52: JP10.2 R80.1 R81.1
N$58: R82.1 SV1.12
N$59: R83.1 SV1.10
N$60: R84.1 SV1.8
N$61: R85.1 SV1.6
N$62: R86.1 SV1.4
N$64: R118.1 U7.3
N$65: JP9.1 R117.2
N$75: R129.2 SV1.13
N$76: R130.2 SV1.11
N$77: R131.2 SV1.9
N$78: R132.2 SV1.7
N$79: R133.2 SV1.5
N$80: R134.2 SV1.3
N$85: JP6.8 R91.2
N$86: JP6.10 R92.2
N$87: JP6.12 R93.2
N$88: JP6.14 R94.2
N$89: JP6.16 R95.2
N$90: JP6.18 R96.2
N$91: JP6.20 R97.2
N$92: JP6.22 R98.2
N$93: JP6.24 R99.2
N$94: JP6.26 R100.2
N$95: JP6.28 R101.2
N$96: JP6.30 R102.2
N$97: JP6.32 R103.2
N$98: JP6.34 R104.2
N$99: JP6.36 R105.2
N$100: JP6.38 R106.2
N$101: JP6.40 R107.2
N$102: JP6.42 R108.2
N$103: JP6.44 R109.2
N$104: JP6.46 R110.2
N$105: JP6.48 R111.2
N$106: JP6.50 R112.2
N$107: JP6.52 R113.2
N$108: JP6.54 R114.2
N$109: JP6.56 R115.2
N$110: LED9.A R3.1
N$112: R119.2 U15.8
N$153: LED10.A R40.1
N$180: R67.2
N$216: C23.1 U$34.3
N_$2: C20.1 R21.1 U8.P$68
N_$24: R20.1 U8.P$64
N_$28: C13.1 C14.1 C15.1 U8.P$87 U8.P$115
N_$29: R22.2 U8.P$59
N_$30: R23.2 U8.P$89
N_$31: C36.1 U8.P$88 Y3.P$3
N_$32: C9.1 R23.1 Y3.P$1
N_$33: C37.1 R24.1 R25.2 U8.P$70
NRESET: ISP1.5 J1.P10 JP2.15 R32.1 SV1.20
PC4: U8.P$25
POWER_IN_12V: C5.1 C25.1 C26.1 D1.A R40.2 R118.2 S1.1 U2.2 U6.2 U7.7 U16.2
SW1: S3.3 U8.P$29
SW2: S3.2 U8.P$49
SW3: S3.1 U8.P$50
SWDCLK/TCLK/SCK: ISP1.3 J1.P4 JP2.9 R4.1 R28.2 SV1.16
SWDIO/TMS: J1.P2 JP2.7 R11.1 SV1.18
SWO/TDO/MOSI: ISP1.1 J1.P6 JP2.13 R12.1 SV1.15
TARGET_TCK/SWCLK: J4.P4 R10.1 U8.P$100
TARGET_TDI: J4.P8 R14.1 U8.P$98
TARGET_TDO/SWO: J4.P6 R13.1 U8.P$97
TARGET_TMS/SWDIO: J4.P2 R9.1 U8.P$99
TDI/MISO: ISP1.4 J1.P8 JP2.5 R31.1 SV1.17
TEST_FAIL: R26.2 U8.P$86
TEST_PASS: R7.2 R41.2 U8.P$93
TEST_RUN: R8.2 R44.2 U8.P$94
TSTR_3V3 [Power]: C3.1 C10.1 C12.1 C16.1 C17.1 C18.1 C19.1 C21.1 C22.2 C24.1 ISP1.2 J1.P1 J4.P1 JP2.1 JP10.1 R3.2 R4.2 R9.2 R10.2 R11.2 R12.2 R13.2 R14.2 R15.2 R18.2 R19.2 R20.2 R21.2 R25.1 R31.2 R32.2 R34.2 R69.2 R70.2 R72.1 R73.2 R75.2 R78.2 U1.24 U3.24 U4.24 U5.3 U8.P$7 U8.P$8 U8.P$9 U8.P$16 U8.P$26 U8.P$28 U8.P$39 U8.P$47 U8.P$51 U8.P$52 U8.P$69 U8.P$79 U8.P$90 U8.P$101 U8.P$113 U8.P$122 U9.7 U9.8 U10.4 U11.4 U12.4 U14.1 U15.3 U$34.2
TSTR_RX: J4.P7 U8.P$22 U14.7
TSTR_SCL: R69.1 R110.1 U3.4 U5.5 U8.P$63 U9.5 U10.5 U11.5 U12.5 U$24.1
TSTR_SCL1: JP4.2 R78.1
TSTR_SDA: R63.2 R70.1 U3.3 U5.4 U8.P$62 U9.6 U10.6 U11.6 U12.6 U$50.2
TSTR_TX: J4.P9 U8.P$23 U14.3
USB_N: JP8.D- R38.1 R41.1 U$5.1
USB_P: JP8.D+ R1.1 R44.1 U$5.2
USBD_N: R38.2 U17.9
USBD_P: R1.2 U17.8
VBUS: C6.1 C7.1 JP8.VBUS R71.2 U14.8 U17.3 U17.12 U$10.1
VCC: R72.2 U9.4
VREN: U7.8

## Tracks (layer width: path | path; a pad name or v marks a point on that pad's centre or on a via)
!RESET  (via drill 0.3 pad 0.3)
  Top 0.229: R24.2 72.09,38.02 71.86,37.8 66.32,37.8 65.33,38.79 65.33,39.73 64.85,40.21 64.85,42.21 64.47,42.7 v62.81,42.7
  Bottom 0.229: J4.P10 58.11,49.35 60.22,49.35 60.91,48.67 JP1.2 | 61.77,48.65 JP1.2 | 61.77,46.11 R15.1 | R15.1 61.61,45.45 62.03,45.03 62.03,43.48 v62.81,42.7 | R15.1 61.61,45.96 61.8,46.15 61.8,48.62 JP1.2
AD0  (via drill 0.3)
  Top 0.229: U8.P$21 49.4,44.91 49,44.5 39.93,44.5 39.32,45.11 | U$8.2 23.28,90.28 24.1,89.46 24.1,73.77 v24.07,73.74
  Top 0.254: 39.52,44.91 39.32,45.11 24.07,60.36 v24.07,73.74 24.18,73.85 | R42.2 25.74,94.18 24.36,94.18 23.28,93.11 U$8.2
  Bottom 0.254: U1.5 35,76.71 32.03,73.74 v24.07,73.74
AD1  (via drill 0.3)
  Top 0.229: 39.57,45.95 40.36,45.16 49.05,45.16 49.2,45.31 49.77,45.31 49.78,45.31 U8.P$20
  Top 0.254: 39.57,45.95 25.18,60.34 v25.18,74.65 U$8.1 25.18,92.9 27,94.72 27.57,94.72 R92.1
  Bottom 0.254: U1.6 34.19,77.34 32.03,75.18 25.71,75.18 v25.18,74.65
AD2  (via drill 0.3)
  Top 0.229: 39.83,46.81 40.93,45.71 U8.P$19
  Top 0.254: 39.83,46.81 25.9,60.74 v25.9,76.43 U$7.2 25.9,92.98 27.2,94.28 28.39,94.28 R43.2
  Bottom 0.254: U1.7 30.73,78 29.36,76.63 26.1,76.63 v25.9,76.43
AD3  (via drill 0.3)
  Top 0.229: U8.P$18 41.09,46.11 40.16,47.04 40.16,47.62 27.8,59.98
  Top 0.254: 27.8,59.98 v27.8,78.08 U$7.1 27.65,90.2 27.15,90.7 27.15,93.24 27.71,93.8 29.15,93.8 R93.1
  Bottom 0.254: U1.8 28.36,78.64 v27.8,78.08
AD4  (via drill 0.3)
  Top 0.229: U8.P$15 47.92,47.31 47.07,48.16 40.72,48.16 40.58,48.3
  Top 0.254: 40.58,48.3 28.51,60.36 v28.51,79.83 U$6.2 28.99,92.82 29.95,93.78 30.42,93.78 R45.2
  Bottom 0.254: U1.9 29.05,79.3 v28.51,79.83
AD5  (via drill 0.3)
  Top 0.229: 40.31,49.63 41.4,48.54 47.3,48.54 48.13,47.71 U8.P$14
  Top 0.254: 40.31,49.63 30.41,59.53 v30.41,72.77 U$6.1 30.71,92.82 R94.1
  Bottom 0.254: U1.4 35.26,76.05 32.03,72.82 30.46,72.82 v30.41,72.77
AD6  (via drill 0.3)
  Top 0.229: U8.P$13 48.36,48.11 47.52,48.95 42.06,48.95
  Top 0.254: 42.06,48.95 31.16,59.85 v31.16,71.25 U$4.2 31.16,92.37 33.58,94.79 33.98,94.79 R47.2
  Bottom 0.254: U1.3 35.21,75.39 34.19,74.37 34.19,72.8 34.21,72.77 34.21,72.72 33.83,72.34 32.25,72.34 v31.16,71.25
AD7  (via drill 0.3)
  Top 0.229: U8.P$12 48.52,48.51 47.65,49.38 42.77,49.38 42.38,49.77
  Top 0.254: 42.38,49.77 33.06,59.09 v33.06,70.97 U$4.1 33.06,93.48 33.83,94.26 34.74,94.26 R95.1
  Bottom 0.254: U1.2 35.21,74.75 34.93,74.47 34.93,71.53 34.34,70.94 33.08,70.94 v33.06,70.97
AD8  (via drill 0.3)
  Top 0.229: 33.8,59.42 42.37,50.85 47.14,50.85 48,51.71 U8.P$4
  Top 0.254: R48.2 35.47,93.75 34.9,93.75 33.97,92.82 U$3.2 v33.8,69.32 33.8,59.42
  Bottom 0.254: U1.22 40.67,75.39 34.59,69.32 v33.8,69.32
AD9  (via drill 0.3)
  Top 0.229: 35.7,58.61 41.99,52.32 49.15,52.32 49.37,52.11 U8.P$3
  Top 0.254: R96.1 35.79,92.82 U$3.1 35.7,68.48 35.74,68.48 v35.66,68.43 35.66,58.65 35.7,58.61
  Bottom 0.254: 42.7,74.75 U1.23 42.16,74.75 v35.66,68.43 35.7,68.4
AD10  (via drill 0.3)
  Top 0.229: 36.41,59.04 42,53.45 48.76,53.45 49.7,52.51 U8.P$2
  Top 0.254: R49.2 38.47,94.21 37.97,94.21 36.41,92.65 U$2.2 v36.41,72.52 36.41,59.04
  Bottom 0.254: U1.21 40.15,76.05 36.41,72.31 v36.41,72.52
AD11  (via drill 0.3)
  Top 0.229: U8.P$1 50.19,52.91 48.67,54.43 44.69,54.43 38.46,60.66
  Top 0.254: R97.1 39.28,93.75 38.38,93.75 38.31,93.69 U$2.1 v38.31,77.11 38.31,60.81 38.46,60.66
  Bottom 0.254: U1.20 38.72,76.71 v38.31,77.11
AD12  (via drill 0.3)
  Top 0.229: 52.38,55.83 U8.P$128
  Top 0.254: 52.38,55.83 39.05,69.15 v39.05,78.26 U$1.2 39.6,92.8 R50.2
  Bottom 0.254: U1.19 39.97,77.34 v39.05,78.26
AD13  (via drill 0.3)
  Top 0.229: 52.78,57.76 U8.P$127 | v40.96,78.05 40.01,79 | 40.01,89.31 40.49,89.79 40.97,90.27 40.97,92.78 U$1.1
  Top 0.254: v40.96,78.05 40.96,69.58 52.78,57.76 | R98.1 40.96,92.91 U$1.1 | 40.01,79 39.52,79.49 39.52,88.82 40.49,89.79
  Bottom 0.254: U1.18 41.01,78 v40.96,78.05
AD14  (via drill 0.3)
  Top 0.229: U8.P$126 53.18,59.62
  Top 0.254: 53.18,59.62 41.7,71.1 v41.7,78.64 40.29,80.05 40.29,86.72 41.7,88.13 U$13.2 41.7,92.35 R51.2
  Bottom 0.254: U1.17 v41.7,78.64
AD15  (via drill 0.3)
  Top 0.229: U8.P$125 53.58,61.38
  Top 0.254: 43.6,79.35 U$13.1 43.6,93.63 43.66,93.7 44.29,93.7 R99.1 | 43.6,79.35 43.6,71.36 53.58,61.38 | 43.6,79.35 42.14,79.35 v41.2,80.29
  Bottom 0.254: U1.16 42.34,79.3 v41.2,80.29
AD16  (via drill 0.3)
  Top 0.229: U8.P$124 53.98,62.23 45.75,70.46 | 45.47,88.87 45.75,88.59 v45.75,83.82 45.75,70.87
  Top 0.254: 45.47,88.87 44.29,90.05 U$14.2 44.68,92.8 R52.2 | 45.75,70.87 45.75,70.46
  Bottom 0.229: 46.84,82.5 45.75,83.59 v45.75,83.82
  Bottom 0.254: U4.9 53.42,80.34 51.26,82.5 46.84,82.5
AD17  (via drill 0.3)
  Top 0.229: U8.P$123 54.38,64.32 | 46.19,72.51 46.19,80.14
  Top 0.254: 46.19,72.51 54.38,64.32 | 46.19,80.14 47.51,81.46 v47.71,81.46 v47.7,81.47 47.7,83.57 46.19,85.08 U$14.1 46.19,93.03 R100.1
  Bottom 0.254: U4.8 53.26,79.68 51.49,81.46 v47.71,81.46
AD18  (via drill 0.3)
  Top 0.229: U8.P$121 55.18,55.49 54.86,55.8 54.86,65.48 53.67,66.67 | 46.88,73.47 46.88,78.94
  Top 0.254: 46.88,73.47 53.67,66.67 | 46.88,78.94 46.88,79.12 v48.35,80.59 48.35,83.7 46.89,85.17 U$15.2 46.88,92.46 R53.2
  Bottom 0.254: U4.7 52.96,79.04 51.41,80.59 v48.35,80.59
AD19  (via drill 0.3)
  Top 0.229: U8.P$120 55.58,65.68 47.65,73.61 47.65,78.05 48.78,79.18 v49.52,79.2
  Top 0.254: v49.52,79.2 49.53,79.21 49.53,83.34 48.78,84.09 U$15.1 48.78,93.48 49,93.7 49.39,93.7 R101.1
  Bottom 0.254: U4.6 52.5,78.38 51.74,79.15 49.49,79.12 v49.52,79.2
ADJ3  (via drill 0.3 pad 0.3)
  Top 0.229: v52.12,30.4 52.12,30.23 53.48,28.87 54.66,27.69
  Top 0.254: v64.08,27.41 54.94,27.41 53.48,28.87
  Bottom 0.229: R35.2 51.85,30.67 v52.12,30.4 | R2.1 63.23,27.69 63.8,27.69 v64.08,27.41
  Bottom 0.254: R2.1 60.62,27.5 U16.5
ADJ4
  Bottom 0.508: U2.5 46.38,30.67 | 46.38,30.67 R37.1 | R116.2 47.11,31.4 46.38,30.67
ADJ5
  Bottom 0.508: U6.5 32.05,28.75 32.96,29.66 R137.1 R138.2
CAN_RX  (via drill 0.3)
  Top 0.229: U8.P$95 68.08,52.51
  Top 0.254: 68.08,52.51 v69.42,53.85 | v89.56,72.11 U15.4
  Bottom 0.254: v69.42,53.85 87.68,72.11 v89.56,72.11
CAN_TX  (via drill 0.3)
  Top 0.229: U8.P$96 67.11,52.91 | U15.1 89.94,75.92 v89.81,75.79
  Top 0.254: 67.11,52.91 v69.39,55.19
  Bottom 0.254: v69.39,55.19 89.81,75.61 v89.81,75.79
D0  (via drill 0.3)
  Top 0.229: U8.P$112 58.78,55.93 58.17,56.54 | v50.31,78.11 50.31,75.52 50.54,75.3
  Top 0.254: v50.31,78.11 50.32,78.11 50.32,83.29 49.5,84.11 U$16.2 49.76,92.8 R54.2 | 50.54,75.3 58.17,67.67 58.17,56.54
  Bottom 0.254: U4.5 52.1,77.75 51.74,78.11 v50.31,78.11
D1  (via drill 0.3)
  Top 0.229: U8.P$111 59.18,57.31 58.75,57.73 58.75,67.66 58.66,67.75
  Top 0.254: 58.66,67.75 51.21,75.2 v51.21,77.34 51.21,90.81 51.4,90.99 U$16.1 51.4,93.19 R102.1
  Bottom 0.254: U4.4 51.46,77.09 v51.21,77.34
D2  (via drill 0.3)
  Top 0.229: U8.P$5 51.94,51.31
  Top 0.254: v51.96,76.08 U$17.2 51.96,91.02 52.65,91.72 52.65,93.15 R55.2 | 51.94,51.31 v52.6,51.97
  Bottom 0.254: v52.6,51.97 52.6,52.37 51.92,53.06 51.92,76.04 v51.96,76.08 52.3,76.43 U4.3
D3  (via drill 0.3)
  Top 0.229: U8.P$6 53.02,50.91
  Top 0.254: 53.02,50.91 v53.62,51.51 | v53.11,75.77 53.11,85.88 53.87,86.64 53.87,90.19 U$17.1 53.86,93.36 54.59,94.08 54.88,94.08 R103.1
  Bottom 0.254: v53.62,51.51 53.62,52.09 52.35,53.37 52.35,75.01 v53.11,75.77 53.14,75.79 U4.2
D4  (via drill 0.3)
  Top 0.229: U8.P$102 62.78,56.68 63.58,57.48 64.29,57.48 65.61,58.8 65.61,60.58 60.33,65.86 60.33,67.11 v54.89,72.54
  Top 0.254: v54.89,72.54 54.58,72.86 U$18.2 54.81,92.8 R56.2
  Bottom 0.254: U4.23 57.94,75.79 v54.89,72.54
D5  (via drill 0.3)
  Top 0.229: U8.P$84 74.14,48.11
  Top 0.254: 55.93,76.25 55.93,72.26 74.4,53.8 74.4,48.36 74.14,48.11 | 55.93,76.25 55.93,88.31 56.44,88.82 56.44,92.76 U$18.1 56.48,93.21 R104.1 | v57.53,76.43 56.11,76.43 55.93,76.25
  Bottom 0.254: U4.22 v57.53,76.43
D6  (via drill 0.3)
  Top 0.229: U8.P$83 74.56,47.71 75.29,48.34
  Top 0.254: 75.29,48.34 75.26,53.95 58.36,70.93 58.39,77.38 57.7,78.06 v57.7,78.77 | 57.71,78.78 v57.7,78.77 | R57.2 57.19,92.61 U$19.2 57.19,79.27 v57.7,78.77
  Bottom 0.254: U4.21 58.67,77.09 57.71,78.05 v57.71,78.75 v57.7,78.77
D7  (via drill 0.3)
  Top 0.229: U8.P$82 75.3,47.31 | 76,48.01 76,54.3 75.77,54.53 | v59.09,78.21 59.09,71.21 60.15,70.15
  Top 0.254: v59.09,78.21 U$19.1 59.09,93.26 R105.1 | 75.77,54.53 60.15,70.15 | 76,48.01 75.3,47.31
  Bottom 0.254: U4.20 59.55,77.75 v59.09,78.21
D8  (via drill 0.3)
  Top 0.229: 76.63,54.33 76.63,47.76 75.78,46.91 U8.P$81
  Top 0.254: 76.63,54.33 76.63,55.78 59.83,72.58 v59.83,79.09 U$20.2 59.83,92.71 R58.2
  Bottom 0.254: U4.19 60.54,78.38 v59.83,79.09
D9  (via drill 0.3)
  Top 0.229: U8.P$78 76.63,45.72
  Top 0.254: 61.62,79.76 61.62,92.45 U$20.1 61.73,93.34 R106.1 | 61.62,79.76 61.62,79.3 61.62,79.09 61.62,71.91 77.45,56.08 77.45,46.53 76.63,45.72 | v60.48,79.73 61.59,79.73 61.62,79.76
  Bottom 0.254: U4.18 60.76,79.04 60.5,79.3 60.5,79.7 v60.48,79.73
D10  (via drill 0.3)
  Top 0.229: U8.P$77 77.85,45.32
  Top 0.254: 62.45,79.48 U$21.2 62.45,92.84 R59.2 | 62.45,79.48 62.45,72.2 78.23,56.41 78.23,45.7 77.85,45.32 | v63.37,79.65 62.63,79.65 62.45,79.48
  Bottom 0.254: U4.17 63.35,79.68 v63.37,79.65
D11  (via drill 0.3)
  Top 0.229: U8.P$76 78.61,44.93
  Top 0.254: 78.61,44.93 79.07,45.38 79.07,56.67 64.35,71.39 v64.35,80.62 U$21.1 64.35,93.47 R107.1
  Bottom 0.254: U4.16 64.07,80.34 v64.35,80.62
D12  (via drill 0.3)
  Top 0.229: U8.P$75 79.09,44.52
  Top 0.254: 79.09,44.52 79.86,45.29 79.86,56.97 66.18,70.65 v66.18,79.3 66.19,79.31 66.19,82.17 65.06,83.3 U$22.2 65.06,92.86 R60.2
  Bottom 0.229: U3.9 v66.18,79.3
D13  (via drill 0.3)
  Top 0.229: U8.P$74 79.93,44.13
  Top 0.254: 79.93,44.13 80.67,44.86 80.67,57.3 66.97,71.01 v66.97,77.98 U$22.1 66.97,93.49 R108.1
  Bottom 0.254: U3.8 67.62,78.64 v66.97,77.98
D14  (via drill 0.3)
  Top 0.229: U8.P$73 80.77,43.73
  Top 0.254: 80.77,43.73 81.43,44.39 81.43,57.66 67.68,71.41 v67.68,77.32 U$23.2 67.68,92.94 R61.2
  Bottom 0.254: U3.7 68.37,78 v67.68,77.32
D15  (via drill 0.3)
  Top 0.229: U8.P$72 81.38,43.33
  Top 0.254: 69.58,77.37 U$23.1 69.58,93.59 R109.1 | 69.58,77.37 69.58,70.63 82.22,57.99 82.22,44.17 81.38,43.33 | v68.43,76.81 68.91,77.37 69.58,77.37
  Bottom 0.254: U3.6 68.89,77.34 v68.43,76.81
D16  (via drill 0.3)
  Top 0.229: U8.P$71 82.14,42.93
  Top 0.254: 70.32,76.91 U$24.2 70.32,93.04 R62.2 | 70.32,76.91 70.32,71.05 83.03,58.34 83.03,43.82 82.14,42.93 | v71.42,76.73 70.5,76.73 70.32,76.91
  Bottom 0.254: U3.5 71.4,76.71 v71.42,76.73
D19  (via drill 0.3)
  Top 0.229: U8.P$61 63.58,37.31 64.62,36.27 79.76,36.27 79.94,36.45
  Top 0.254: 79.94,36.45 85.37,41.88 85.37,59.21 73.72,70.86 v73.72,73.91 73.72,85.18 74.85,86.31 74.85,90.22 U$50.1 74.86,93.75 R111.1
  Bottom 0.254: U3.2 71.48,74.75 72.34,73.89 73.7,73.89 v73.72,73.91
D20  (via drill 0.3)
  Top 0.229: U$49.2 75.58,89.76 | 80.48,35.9 80.39,35.81 64.44,35.81 63.18,37.08 U8.P$60
  Top 0.254: 80.48,35.9 86.13,41.55 86.13,59.54 76.76,68.91 76.76,79.93 | R64.2 75.58,93.22 U$49.2 | 76.76,79.93 76.76,88.58 75.58,89.76 | v75.78,79.32 76.15,79.32 76.76,79.93
  Bottom 0.254: U3.16 75.76,79.3 v75.78,79.32
D21  (via drill 0.3)
  Top 0.229: U8.P$46 57.58,36.56
  Top 0.254: 57.58,36.56 59.64,34.49 79.81,34.51 80.23,34.51 86.97,41.25 86.97,59.84 77.48,69.33 77.48,78.66 | 77.48,78.66 U$49.1 77.48,93.85 R112.1 | v78.64,78.64 77.51,78.64 77.48,78.66
  Bottom 0.254: U3.17 v78.64,78.64
D22  (via drill 0.3)
  Top 0.229: U8.P$45 57.18,36.35
  Top 0.254: 57.18,36.35 59.46,34.06 80.49,34.08 80.89,34.08 87.78,40.97 87.78,60.15 79.38,68.55 v79.38,77.75 79.38,85.19 78.17,86.39 U$37.2 78.17,93.27 R65.2
  Bottom 0.254: U3.18 79.12,78 v79.38,77.75
D23  (via drill 0.3)
  Top 0.229: U8.P$44 56.78,36.14
  Top 0.254: 56.78,36.14 59.28,33.63 81.61,33.65 81.61,33.68 88.59,40.66 88.59,60.45 80.07,68.98 v80.07,76.89 U$37.1 80.07,93.9 R113.1
  Bottom 0.254: U3.19 78.44,77.34 78.87,76.91 80.05,76.91 v80.07,76.89
D24  (via drill 0.3)
  Top 0.229: U8.P$43 56.38,35.93
  Top 0.254: 56.38,35.93 59.11,33.2 81.38,33.22 82.27,33.22 89.38,40.34 89.38,60.73 80.79,69.33 v80.79,75.92 U$36.2 80.93,92.77 82.93,94.77 R66.2
  Bottom 0.254: U3.20 78.44,76.71 79.07,76.07 80.64,76.07 v80.79,75.92
D25  (via drill 0.3)
  Top 0.229: U8.P$42 55.98,35.72
  Top 0.254: 55.98,35.72 58.93,32.77 58.95,32.79 82.93,32.79 90.14,40.01 90.14,61.11 82.88,68.38 82.88,76.05 v82.91,76.07 82.91,92.55 U$36.1 82.69,93.28 84.2,94.79 R114.1
  Bottom 0.254: U3.21 78.33,76.05 79.07,75.28 82.12,75.28 v82.91,76.07
DUT_AOUT1  (via drill 0.3, 0.3 pad 0.3)
  Top 0.229: U5.1 103.96,78.71 v105.28,78.71
  Top 0.254: v106.53,82.83 101.72,87.64 U$45.2 101.72,93.98 R82.2
  Bottom 0.229: v105.28,78.71 105.28,81.58 v106.53,82.83
  Bottom 0.254: JP3.12 118.14,71.22 v106.53,82.83
DUT_CAN_N  (via drill 0.3)
  Top 0.152: JP11.1 107.32,78.63 112.41,83.72 v112.22,83.92 | U$25.2 115.93,93.77 R87.2 115.93,91.85 116.13,91.64 117.55,91.64 v117.58,91.67 | 121.41,96.62 JP3.2
  Top 0.254: U15.6 JP11.1 | v119.33,95.75 120.54,95.75 121.41,96.62
  Bottom 0.152: 112.41,83.72 v112.22,83.92 112.43,84.13 112.82,84.13 118.67,89.98 118.67,92.18 | 118.67,92.18 118.67,94.27 119.58,95.18 119.58,95.5 v119.33,95.75 | v117.58,91.67 118.16,91.67 118.67,92.18
DUT_CAN_P  (via drill 0.3)
  Top 0.152: 116.9,92.44 U$25.1 116.51,92.83 116.51,94.06 117.17,94.72 R135.1 117.68,95.49 119.45,97.26 120.42,97.26 | R140.2 v109.75,75.54 | 109.75,75.77 109.75,80.63 112.63,83.51 v112.83,83.31
  Top 0.254: U15.7 v103.53,74.65 | v109.75,75.54 109.75,75.77 | JP3.1 122.38,97.26 120.42,97.26
  Bottom 0.152: 112.63,83.51 v112.83,83.31 113.04,83.52 113.04,83.92 118.97,89.85 118.97,94.14 123.99,99.16 JP3.1 123.81,99.16
  Bottom 0.254: v103.53,74.65 108.86,74.65 v109.75,75.54
DUT_CONNECT  (via drill 0.3)
  Top 0.229: U8.P$85 64.05,48.51 62.99,47.45 62.99,45.11 v63.93,44.07
  Top 0.254: v68.2,23.95 68.2,21.26 61.72,14.78 R27.2
  Bottom 0.229: 68.1,39.6 65.48,42.21 65.48,42.62 v63.93,44.07
  Bottom 0.254: v68.2,23.95 68.2,39.5 68.1,39.6
DUT_CS  (via drill 0.3)
  Top 0.229: U8.P$36 53.58,34.46
  Top 0.254: 53.58,34.46 58.6,29.44 86.06,29.46 86.33,29.46 94.82,37.95 94.82,47.14 119.86,72.19 119.86,79.02 120.93,80.09 125.4,80.09 126.21,80.9 126.21,85.27 124.99,86.49 124.31,86.49 JP3.6 123.63,87.11 JP7.1 JP4.1 | v115.8,83.41 115.6,83.41 109.57,89.44 U$48.2 109.57,94.21 R85.2
  Bottom 0.254: v115.8,83.41 119.23,83.41 122.17,86.36 124.18,86.36 JP3.6
DUT_LIN  (via drill 0.3)
  Top 0.254: v111.25,67.33 110.71,67.33 JP9.2 108.62,66.39 U7.6 | v106.76,81.51 100.84,87.45 100.84,90.53 101,90.69 U$44.1 101,94.56 R129.1
  Bottom 0.254: JP3.13 111.89,68.68 111.68,68.88 | v106.76,81.51 111.68,76.58 111.68,68.88 | 111.68,68.88 111.68,67.87 v111.25,67.33
DUT_MISO
  Top 0.152: JP3.4 122.3,91.54 119.58,88.82 113.97,88.82 113.39,89.41 113.39,91.33 | R86.2 113.39,91.33 | 113.39,91.33 U$26.2
  Top 0.229: U8.P$35 53.18,34.28
  Top 0.254: 53.18,34.28 58.45,29.01 86.84,29.03 86.94,29.03 95.61,37.69 95.61,46.81 120.68,71.88 120.68,75.26 123.22,77.8 125.7,77.8 126.87,78.97 126.87,90.86 126.19,91.54 JP3.4
DUT_MOSI  (via drill 0.3)
  Top 0.229: U8.P$37 53.98,34.64 | 85.62,29.89 62.33,29.87
  Top 0.254: 53.98,34.64 58.75,29.87 62.33,29.87 | JP3.7 121.46,83.92 119.15,81.61 119.15,72.54 94.03,47.42 94.03,38.25 85.67,29.89 85.62,29.89 | v116.48,82.35 115.93,82.35 108.86,89.41 108.86,90.09 U$47.1 108.85,94.79 R132.1
  Bottom 0.254: v116.48,82.35 122.71,82.35 JP3.7
DUT_ONEWIRE  (via drill 0.3 pad 0.3)
  Top 0.152: JP3.3 121.79,94.08 117.83,90.12 116.89,89.18 114.83,89.18 113.84,90.17 113.84,90.37 | R134.1 114.61,94.26 113.84,93.5 113.84,90.37 | 113.84,90.37 U$26.1
  Top 0.229: v85.85,76.28 87.5,77.93 91.16,77.93 | 95.5,82.27 104.85,82.27 106.58,80.54 107.09,80.54 v111.25,84.71 | v116.79,90.07 117.78,90.07 117.83,90.12 | U8.P$11 51.83,48.91 53.82,50.9 54.41,50.9 54.86,50.44 59.39,50.44 v62.38,53.19
  Top 0.254: 91.16,77.93 95.5,82.27
  Bottom 0.229: 62.64,56.01 77.56,70.93 80.5,70.93 v85.85,76.28 | v111.25,84.71 111.43,84.71 v116.79,90.07
  Bottom 0.254: v62.38,53.19 62.38,55.75 62.64,56.01
DUT_RX  (via drill 0.3)
  Top 0.229: U8.P$33 52.38,33.88
  Top 0.254: 52.38,33.88 58.12,28.14 88.16,28.17 88.26,28.17 97.16,37.06 97.16,46.63 123.01,72.49 125.4,72.49 126.31,73.41 126.31,75.46 125.48,76.3 JP3.10 | v107.52,83.77 104.33,86.95 U$46.2 104.33,94.06 R83.2
  Bottom 0.254: v107.52,83.77 114.99,76.3 JP3.10
DUT_SCL  (via drill 0.3)
  Top 0.229: U8.P$91 67.98,50.91 v68,50.9 | R80.2 v112.75,82.27
  Top 0.254: v108.94,85.19 106.23,87.9 U$46.1 106.23,94.71 R131.1 | v101.63,83.34 95.68,83.34 91.31,78.97 v90.78,78.97
  Bottom 0.229: v112.75,82.27 112.75,81.38 | v68,50.9 68.4,51.33 68.4,52.22
  Bottom 0.254: v101.63,83.34 103.48,85.19 v108.94,85.19 112.75,81.38 JP3.8 | v90.78,78.97 90.78,78.61 68.4,56.23 68.4,52.22
DUT_SCLK
  Top 0.229: U8.P$38 54.38,34.85 | 93.29,47.57 93.29,42.47
  Top 0.254: 54.38,34.85 58.95,30.28 83.87,30.3 84.97,30.3 93.29,38.62 93.29,42.47 | JP3.5 120.47,89 119.53,88.06 116.03,88.06 114.85,86.88 | 117.3,84.43 117.32,84.43 | 117.3,84.43 117.3,71.58 93.29,47.57 | 117.3,84.43 114.85,86.88 | 114.85,86.88 114.76,86.97 112.65,86.97 111.47,88.15 U$48.1 111.47,94.86 R133.1
DUT_SDA  (via drill 0.3)
  Top 0.229: U8.P$92 67.34,51.31 | R81.2 114.9,80.2 115.67,80.97
  Top 0.254: v101.25,85.88 97.23,85.88 91.34,79.98 v90.78,79.98 | 110.26,87.17 108.46,88.98 108.08,88.98 U$47.2 106.95,94.13 R84.2 | 110.26,87.17 115.67,81.76 115.67,80.97 v115.67,78.84 | v109.37,86.46 110.08,87.17 110.26,87.17 | 67.34,51.31 v67.74,51.87
  Bottom 0.229: 67.74,53.04 67.74,56.41 67.87,56.54
  Bottom 0.254: v101.25,85.88 108.61,85.88 109.2,86.46 v109.37,86.46 | JP3.9 v115.67,78.84 | v67.74,51.87 67.74,53.04 | v90.78,79.98 89.5,78.7 89.5,78.17 67.87,56.54
DUT_SH+
  Top 0.254: U12.1 21.01,82.71 R17.2
  Top 0.508: R17.2 22.47,86.86 22.78,87.17 22.78,89.96 U$9.1
  Top 0.635: U$9.1 22.54,91.48 21.92,92.1 21.92,93.03 R91.1
DUT_SH-
  Top 0.254: U12.2 20.37,82.75 19.74,83.39 18.86,83.39 R17.1
  Top 0.508: U$9.2 20.64,86.75 R17.1
  Top 1.27: U$9.2 20.64,94.26 R39.2
DUT_TX  (via drill 0.3)
  Top 0.229: U8.P$34 52.78,34.07
  Top 0.254: 52.78,34.07 58.27,28.57 87.68,28.6 87.68,28.68 96.39,37.39 96.39,46.79 123.37,73.76 JP3.11 | v107.72,82.6 103.62,86.7 U$45.1 103.62,94.64 R130.1
  Bottom 0.254: v107.72,82.6 116.56,73.76 JP3.11
GND  (via drill 0.3, 0.3 pad 0.3)
  Top 0.229: v63.91,46.51 U8.P$80 76.15,46.51 v76.25,46.41 | C36.2 72.05,53.19 C9.2 72.49,53.16 v73.05,53.62 | U5.2 103.62,79.99 C3.2 | v92.94,22.28 93.47,21.74 C24.2 94.37,16.12 v95.48,15.01 | U12.3 19.71,80.36 19.84,80.24 | C12.2 24.61,58.85 25.93,57.53 25.93,56.34 25.91,56.31 | U15.2 v98.65,74.65 | v98.17,77.01 98.21,77.05 R46.2 | U8.P$10 49.48,49.31 C16.2 48.38,49.59 v48.13,49.83 | R79.2 118.07,83.58 117.75,83.9 117.75,85.24 v117.02,85.98 | U8.P$17 51.82,46.51 v52.1,46.28 | C19.2 C18.2 43.98,43.7 v43.87,43.59 | U8.P$17 41.68,46.51 v41.25,46.94 | U8.P$114 57.98,55.64 v57.99,55.7 | U8.P$17 46.58,46.51 | U8.P$55 61.18,39.89 61.44,40.16 62.18,40.16 62.38,39.96 U8.P$58 62.38,37.2 62.13,36.96 v62.13,36.32 62.13,35.49 R22.1 | U8.P$48 58.38,40.18 v58.78,40.23 | 27.38,53.34 v27.38,53.09 | C22.1 23.54,51.9 v25.76,49.68 | R76.1 26.11,44.88 v25.91,45.09 | U11.3 34.57,46.43 v35.15,47.02 | C20.2 68.1,39.22 v68.89,38.43 | v65.56,35.18 v69.42,35.18 | U$8.3 v24.23,91.77
  Top 0.254: v93.83,12.04 97.51,12.04 98.15,11.4 J1.P5 | C24.2 94.16,21.96 U$34.1 92.85,23.34 C23.2 | U11.3 34.08,46.43 C21.2 | U12.3 19.71,80.31 | 19.71,80.31 19.43,80.03 18.35,80.03 C10.2 | R77.2 22.37,80.89 21.72,80.24 v21.08,80.24 19.84,80.24 19.79,80.24 19.71,80.31 | U9.3 22.58,50.27 23.49,51.18 C22.1 | R74.1 18.59,55.88 v17.98,55.65 | U10.3 25.91,56.31 27.38,54.84 27.38,53.34 | U14.4 v70.56,21.67 | LED10.C 42.23,4.51 v42.98,5.26 | LED8.C 44.85,4.51 v45.54,5.21 | LED7.C 47.34,4.51 v48.03,5.21 | LED6.C 49.85,4.51 v50.55,5.21 | LED9.C 52.42,4.51 v53.11,5.21 | LED2.C 54.86,4.51 v55.55,5.21 | LED1.C 57.37,4.51 v58.07,5.21 | LED3.C 59.76,4.51 v60.48,5.23 | LED4.C 62.3,4.51 v62.99,5.21 | LED5.C 64.71,4.51 v65.41,5.21 | U$44.3 100.04,91.08 v100.05,91.64 | U$45.3 v102.67,89.08 | U$46.3 v105.28,91.64 | U$47.3 107.9,87.25 v108.31,86.84 | U7.5 105.26,65.1 v107.04,65.1 | U15.2 v101.88,74.65 102.4,75.17 R119.1 | U5.2 v102.08,80.29 | JP6.58 89.26,100.23 89.26,96.01 88.73,95.49 R68.2 R115.1 | U$7.3 v26.85,89.18 | U$6.3 v29.46,91.77 | U$4.3 32.13,88.13 v32.13,89.15 | U$3.3 v34.75,91.82 | U$2.3 v37.36,89.23 | U$1.3 v40.01,91.77 | U$13.3 v42.65,89.18 | U$14.3 45.26,90.72 v45.26,91.77 | U$15.3 47.91,88.23 47.91,88.42 47.83,88.49 v47.83,89.25 | U$16.3 v50.45,91.77 | U$17.3 v52.91,89.23 | U$18.3 v55.52,91.8 | U$19.3 58.17,88.13 v58.17,89.23 | U$20.3 60.81,90.49 v60.81,91.54 | U$21.3 v63.4,89.18 | U$22.3 66.04,90.72 v66.04,91.8 | U$23.3 v68.63,89.23 | U$24.3 71.3,90.77 v71.3,91.87 | U$50.3 73.94,88.16 v73.94,89.25 | U$49.3 v76.53,91.8 | U$37.3 v79.12,89.23 | U$36.3 81.71,90.7 v81.71,91.74 | U$48.3 110.54,90.59 v110.54,91.67 | U$26.3 112.47,88.69 v112.47,88.95
  Top 0.254: U$25.3 115.01,91.28 v115.01,91.39 | v34.98,82.25 34.75,82.47 | U$9.3 21.59,86.31 v20.78,85.5 | v53.75,63.93 v50.45,67.23 | v51.38,22.91 53.92,25.45 v57.2,25.45
  Top 0.508: 34.75,82.47 v34.75,84.33 | v41.71,81.25 v41.71,84.58
  Top 1.27: JP5.GND 20.32,5.9 JP5.GNDBREAK